# Altium PCB TenkUbavic.PcbDoc
Units mm, origin at the board's own origin, x right, y up, seen from the top; angles counter-clockwise.
Board outline 115.7 x 87.88 mm, 2 copper layers (Top Layer, Bottom Layer); 48 components, 36 nets, 179 pads, 29 vias.
Unrouted connection lines stored in the file: 1.
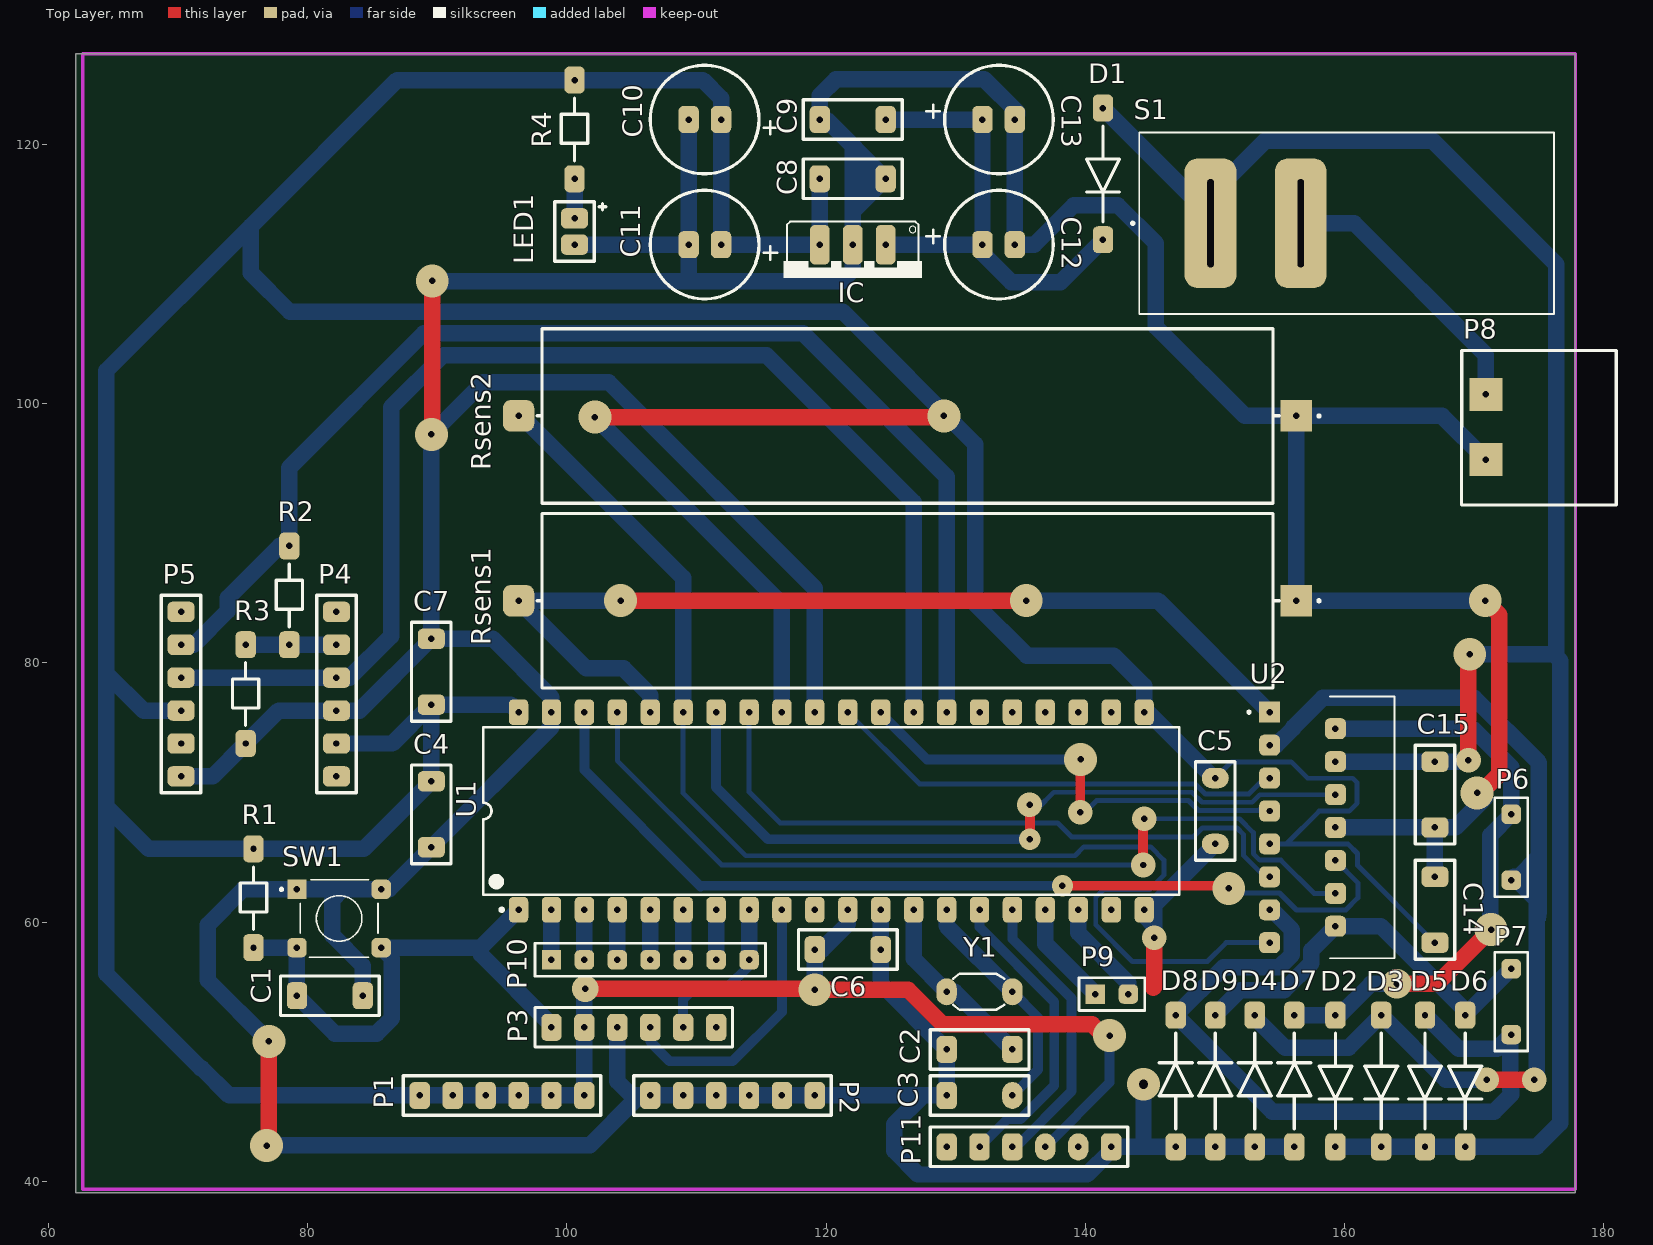
[diagram p0: Top Layer view]
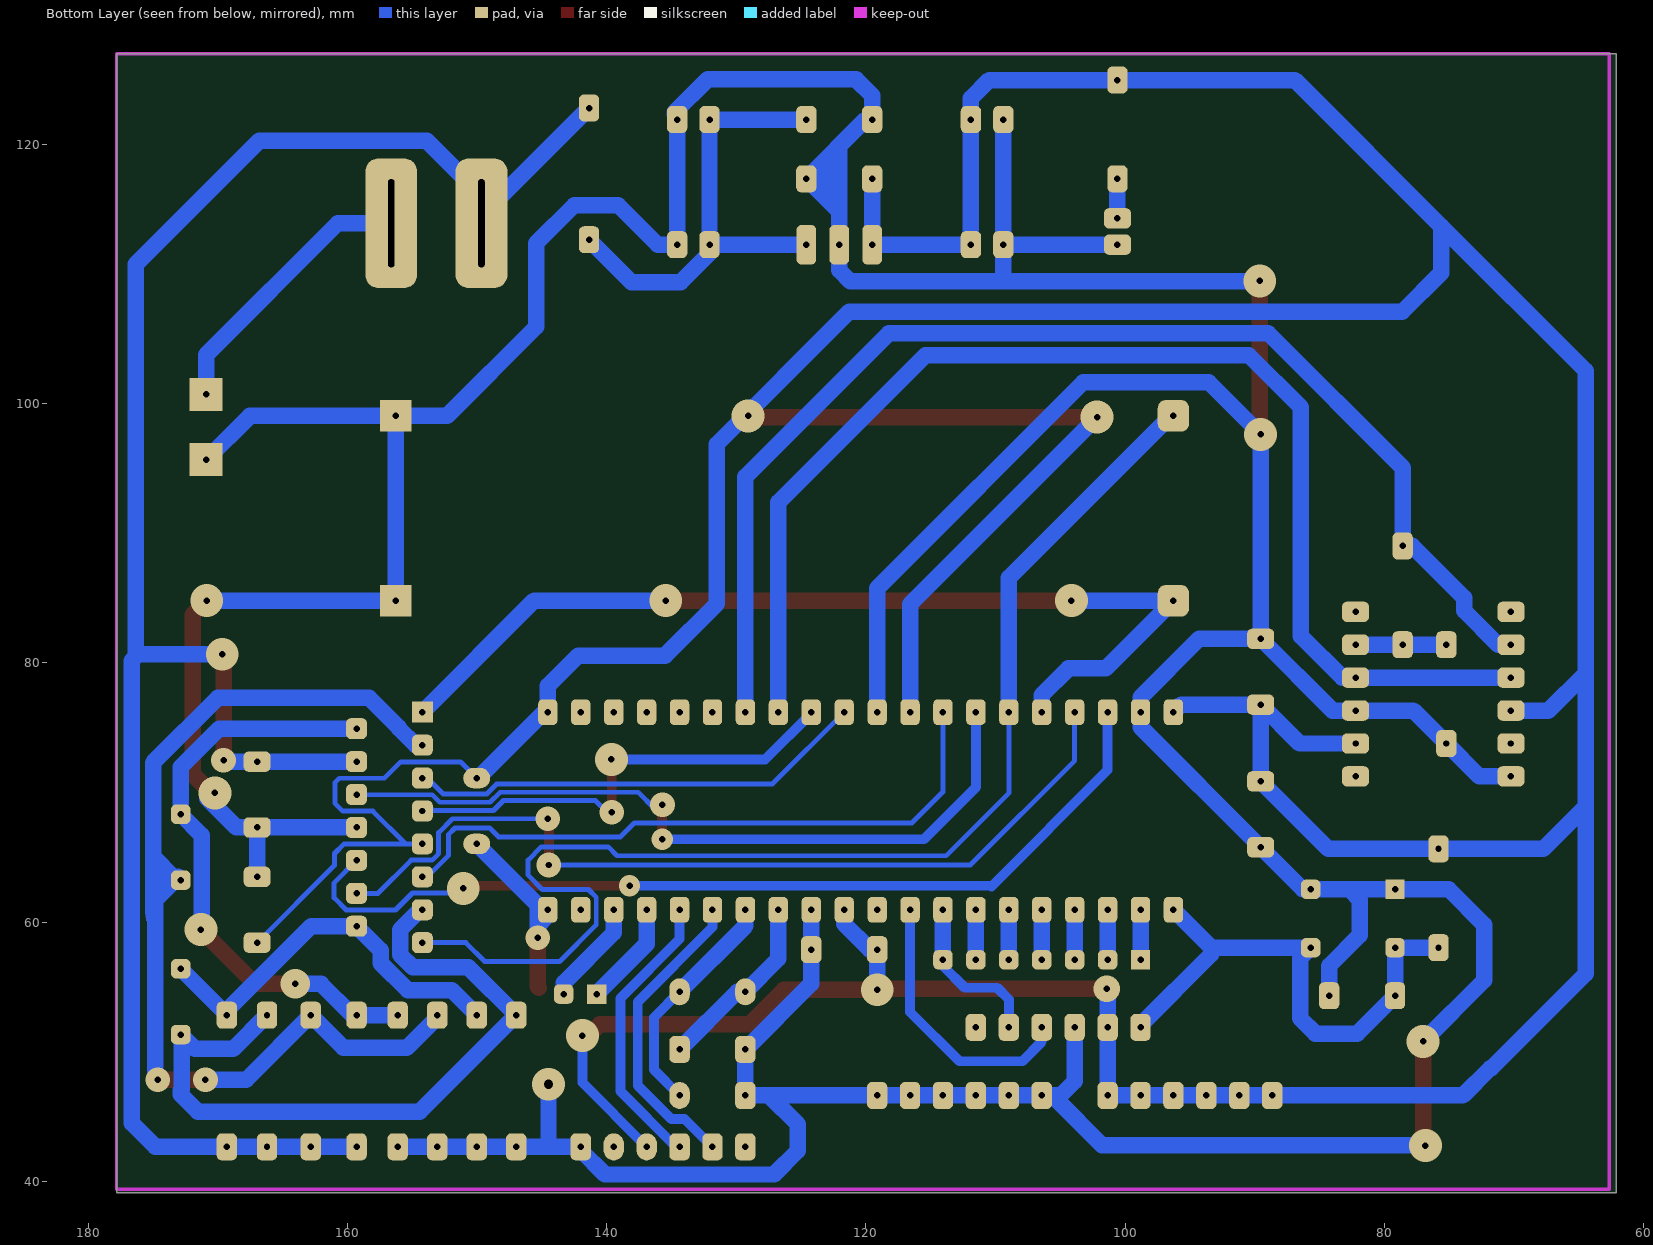
[diagram p1: Bottom Layer view, seen from below]

## Layer stack, top to bottom
Top Solder: solder mask 0.0102, Solder Resist, Dk 3.5
Top Layer: signal copper 0.0356
Dielectric 1: dielectric 0.32, FR-4, Dk 4.8
Bottom Layer: signal copper 0.0356
Bottom Solder: solder mask 0.0102, Solder Resist, Dk 3.5

## Board outline
62.103,39.116 177.8,39.116 177.8,127 62.103,127

## Design rules (kind name [scope] priority, off if disabled: settings)
Clearance [All] p1: gap=0.254 ignorepadtopadclearanceinfootprint=FALSE
PolygonConnect [All] p1: connectstyle=Relief reliefconductorwidth=0.254 reliefentries=4 polygonreliefangle="90 Angle" airgapwidth=0.254
RoutingVias [All] p1: holewidth=0.711 width=1.27 viastyle="Through Hole" minholewidth=0.711 minwidth=1.27 maxholewidth=0.711 maxwidth=1.27
SolderMaskExpansion [All] p1: expansion=0.102
Width Width_1 [InNetClass('PWR')] p1: maxlimit=1.27 minlimit=1.27 preferedwidth=1.27
Width [InNetClass('Signal')] p2: maxlimit=1.27 minlimit=0.381 preferedwidth=0.762
30 further rules are at their usual default settings.

## Components (designator, comment, footprint, x,y, rotation, side; value= is the part's Value field where it differs from the comment)
C1 "Cap" CAP200#1 84.253,54.331 r180 top value=100nF
C2 "Cap" CAP200#1 129.286,50.19 r0 top value=33pF
C3 "Cap" CAP200#2 129.286,46.634 r0 top value=33pF
C4 "Cap" CAP200#1 89.535,65.786 r90 top value=100nF
C5 "Cap" CAP200#3 150.012,66.04 r90 top value=100nF
C6 "Cap" CAP200#1 124.206,57.887 r180 top value=100nF
C7 "Cap" CAP200#1 89.535,81.864 r270 top value=100nF
C8 "Cap" CAP200#1 124.587,117.348 r180 top value=100nF
C9 "Cap" CAP200#1 119.507,121.92 r0 top value=100nF
C10 "Cap Pol1" RAD4 111.887,121.92 r180 top value=470uF
C11 "Cap Pol1" RAD4 111.887,112.268 r180 top value=470uF
C12 "Cap Pol1" RAD4 132.055,112.268 r0 top value=470uF
C13 "Cap Pol1" RAD4 132.055,121.92 r0 top value=470uF
C14 "Cap" CAP200#1 166.954,63.5 r270 top value=100nF
C15 "Cap" CAP200#1 166.954,67.31 r90 top value=100nF
D1 "Diode 1N4007" DIODE400 141.351,117.983 r90 top
D2 "Diode 1N5402" DIODE400 159.283,48.006 r90 top
D3 "Diode 1N5402" DIODE400 162.814,48.006 r90 top
D4 "Diode 1N5402" DIODE400 153.06,47.498 r270 top
D5 "Diode 1N5402" DIODE400 166.192,48.006 r90 top
D6 "Diode 1N5402" DIODE400 169.291,48.006 r90 top
D7 "Diode 1N5402" DIODE400 156.109,47.498 r270 top
D8 "Diode 1N5402" DIODE400 146.964,47.498 r270 top
D9 "Diode 1N5402" DIODE400 150.012,47.498 r270 top
IC "L7805" 78XXS 122.047,109.728 r180 top
LED1 "GREEN" LED_2 100.965,113.284 r270 top
P1 "5V" HEADER_6#1 94.996,46.634 r90 top
P2 "GND" HEADER_6#1 112.776,46.634 r90 top
P3 "Programator" HEADER_6#1 105.156,51.892 r90 top
P4 "Bluetooth" HEADER_6#1 82.22,77.597 r180 top
P5 "FT232" HEADER_6#1 70.231,77.597 r0 top
P6 "Motor 1" KLEMA 172.847,65.659 r270 top
P7 "Motor 2" KLEMA 172.847,54 r90 top
P8 "2EDGRC-5.08-02P-14-00A(H)" PWR_Con 174.955,98.603 r0 top
P9 "Interrupt" HDR1X2 140.767,54.458 r0 top
P10 "GPIO" HDR1X7 98.806,57.099 r0 top
P11 "FT232" HEADER_6#2 135.636,42.672 r90 top
R1 "Res1" RES400 75.819,61.849 r90 top value=10K
R2 "Res1" RES400 78.588,85.217 r90 top value=4.7K
R3 "Res1" RES400 75.209,77.597 r90 top value=10K
R4 "Res1" RES400 100.584,121.158 r90 top value=1K
Rsens1 "15W" Rsens 126.266,84.797 r180 top value=5
Rsens2 "15W" Rsens 126.266,99.06 r180 top value=5
S1 "" SW_RB141C1100 160.147,113.919 r180 top
SW1 "TASTER" SW_1825910-6-4 82.423,60.289 r0 top
U1 "DSPIC30F4013-20I/P" PDIP600-P40 120.396,68.58 r90 top
U2 "L298N" TO127P2020X500X2100-15 154.203,76.2 r0 top
Y1 "XTAL" OSC_5 131.445,54.635 r90 top

## Footprints (in the part's own frame and the unit in brackets; to place one, negate y for a bottom-side part, rotate by r counter-clockwise, add the part's x,y. Pads: shape width x height; smd on the part's side, far side on the other; paste and mask are expansions set on the pad)
78XXS [mil]
  rrect50% 60x120 hole 19.68: GND(0,-100) IN(-100,-100) OUT(100,-100)
  silkscreen extent -210,-170 210,0
CAP200#1 [mil]
  rrect50% 62x82 hole 19.68: 1(0,0) 2(200,0)
  silkscreen extent -50,-60 250,60
CAP200#2 [mil]
  rrect50% 62x82 hole 19.68: 1(0,0)
  oval 62x82 hole 19.68: 2(200,0)
  silkscreen extent -50,-60 250,60
CAP200#3 [mil]
  oval 62x82 hole 19.68: 1(0,0) 2(200,0)
  silkscreen extent -50,-60 250,60
DIODE400 [mil]
  rrect50% 82x62 hole 19.68: 1(190,0) 2(-210,0)
  silkscreen extent -155,-50 135,50
HDR1X2 [mm] "Connector; Header; 2 Position"
  rect 1.5x1.5 hole 0.5: 1(0,0)
  rrect50% 1.5x1.5 hole 0.5: 2(2.54,0)
  silkscreen extent -1.27,-1.27 3.81,1.27
HDR1X7 [mm] "Connector; Header; 7 Position"
  rect 1.5x1.5 hole 0.5: 1(0,0)
  rrect50% 1.5x1.5 hole 0.5: 2(2.54,0) 3(5.08,0) 4(7.62,0) 5(10.16,0) 6(12.7,0) 7(15.24,0)
  silkscreen extent -1.27,-1.27 16.51,1.27
HEADER_6#1 [mil]
  rrect50% 82x62 hole 19.68: 1(0,250) 2(0,150) 3(0,50) 4(0,-50) 5(0,-150) 6(0,-250)
  silkscreen extent -60,-300 60,300
HEADER_6#2 [mil]
  rrect50% 82x62 hole 19.68: 1(0,250) 2(0,150) 3(0,50) 6(0,-250)
  oval 82x62 hole 19.68: 4(0,-50) 5(0,-150)
  silkscreen extent -60,-300 60,300
KLEMA [mm] "Connector; Header; 2 Position"
  rrect50% 1.5x1.5 hole 0.5: 1(-2.667,0) 2(2.413,0)
  silkscreen extent -3.94,-1.27 3.68,1.27
LED_2 [mil]
  rrect50% 62x82 hole 19.68: 1(40,-15) 2(-40,-15)
  silkscreen extent -90,-75 90,80, body extent -105,-126 110,106, height 346
OSC_5 [mil]
  oval 82x62 hole 19.68: 1(0,-115) 2(0,85)
  silkscreen extent -55,-90 55,65, body extent -92,-240 92,207, height 138
PDIP600-P40 [mm] "DIP, 40-Leads, Row Spacing 15.24mm, Pitch 2.54mm, Body 51.8x13.5mm"
  rrect50% 2x1.5 hole 0.5: 1(-7.62,24.13) 2(-7.62,21.59) 3(-7.62,19.05) 4(-7.62,16.51) 5(-7.62,13.97) 6(-7.62,11.43) 7(-7.62,8.89) 8(-7.62,6.35) 9(-7.62,3.81) 10(-7.62,1.27) 11(-7.62,-1.27) 12(-7.62,-3.81) 13(-7.62,-6.35) 14(-7.62,-8.89) 15(-7.62,-11.43) 16(-7.62,-13.97) 17(-7.62,-16.51) 18(-7.62,-19.05) 19(-7.62,-21.59) 20(-7.62,-24.13) 21(7.62,-24.13) 22(7.62,-21.59) 23(7.62,-19.05) 24(7.62,-16.51) 25(7.62,-13.97) 26(7.62,-11.43) 27(7.62,-8.89) 28(7.62,-6.35) 29(7.62,-3.81) 30(7.62,-1.27) 31(7.62,1.27) 32(7.62,3.81) 33(7.62,6.35) 34(7.62,8.89) 35(7.62,11.43) 36(7.62,13.97) 37(7.62,16.51) 38(7.62,19.05) 39(7.62,21.59) 40(7.62,24.13)
  silkscreen extent -7.74,-26.85 6.45,26.85, body extent -7.3,-26.85 7.3,26.85, height 6.35
PWR_Con [mil]
  rect 100x100 hole 19.68: 1(-160,-115) 2(-160,83)
  silkscreen extent -234,-253 236,217, body extent -239,-256 234,222, height 344
RAD4 [mil]
  rrect50% 62x82 hole 19.68: 1(0,0) 2(98.43,0)
  silkscreen extent -170,-165 215,165
RES400 [mil]
  rrect50% 82x62 hole 19.68: 1(-150,0) 2(150,0)
  silkscreen extent -95,-40 95,40
Rsens [mm]
  rrect50% 2.43x2.43 hole 0.5: A(30,0)
  rect 2.43x2.43 / inner round 2.43 / far side rect 2.43x2.43 hole 0.5: C(-30,0)
  silkscreen extent -31.85,-6.73 28.57,6.73
SW_1825910-6-4 [mm]
  rect 1.498x1.498 hole 0.5: 1(-3.25,2.25)
  rrect50% 1.498x1.498 hole 0.5: 2(3.25,2.25) 3(-3.25,-2.25) 4(3.25,-2.25)
  silkscreen extent -4.54,-3 3,3
SW_RB141C1100 [mm]
  rrect50% 4x10 hole 0.5 slot 6.8 at 90 deg: 1(10.5,0) 2(3.54,0)
  silkscreen extent -16,-7 16.6,7, body extent -16.35,-7 16.35,7, height 24.57
TO127P2020X500X2100-15 [mm]
  rect 1.62x1.62 hole 0.5: 1(0,0)
  rrect50% 1.62x1.62 hole 0.5: 2(5.08,-1.27) 3(0,-2.54) 4(5.08,-3.81) 5(0,-5.08) 6(5.08,-6.35) 7(0,-7.62) 8(5.08,-8.89) 9(0,-10.16) 10(5.08,-11.43) 11(0,-12.7) 12(5.08,-13.97) 13(0,-15.24) 14(5.08,-16.51) 15(0,-17.78)
  silkscreen extent -1.69,-18.99 9.63,1.21

## Part data
C1 C2 C3 C4 C5 C6 C7 C8 C9 C14 C15: "Capacitor", LatestRevisionDate=17-Jul-2002, LatestRevisionNote="Re-released for DXP Platform.", PackageDescription="Radial Cap, Thru-Hole; 2 Leads; 0.3 in Pin Spacing", PackageReference=RAD-0.3, Published=8-Jun-2000, Publisher="Altium Limited"
C10 C11 C12 C13: "Polarized Capacitor (Radial)", LatestRevisionDate=17-Jul-2002, LatestRevisionNote="Re-released for DXP Platform.", PackageDescription="Polarized Capacitor (Radial); 2 Leads", PackageReference=RB7.6-15, Published=8-Jun-2000, Publisher="Altium Limited"
D1: "1 Amp General Purpose Rectifier", Code_JEDEC=DO-204-AL, ComponentLink1Description="Manufacturer Link", ComponentLink1URL=http://www.fairchildsemi.com/, ComponentLink2Description=Datasheet, ComponentLink2URL=http://www.fairchildsemi.com/ds/1N%2F1N4001.pdf, DatasheetVersion=1998, LatestRevisionDate=17-Jul-2002, LatestRevisionNote="Re-released for DXP Platform.", PackageDescription="Diode, Axial; Body 5.2 x 2.7 mm (LxDia. max), Lead Dia. 0.86 mm (max)", PackageReference=DO-41, PackageVersion=Aug-1999, Published=8-Jun-2000, Publisher="Altium Limited"
D2 D3 D4 D5 D6 D7 D8 D9: "3 Amp General Purpose Rectifier", ComponentLink1Description="Manufacturer Link", ComponentLink1URL=http://www.fairchildsemi.com/, ComponentLink2Description=Datasheet, ComponentLink2URL=http://www.fairchildsemi.com/ds/1N%2F1N5400.pdf, DatasheetVersion=1998, LatestRevisionDate=17-Jul-2002, LatestRevisionNote="Re-released for DXP Platform.", PackageDescription="Diode, Axial; Body 9.5 x 5.6 mm (LxDia. max), Lead Dia. 1.32 mm (max)", PackageReference=DO-201AD, PackageVersion=Aug-1999, Published=8-Jun-2000, Publisher="Altium Limited"
IC: "Linear Voltage Regulator IC 1 Output 1.5A D2PAK", Package="TO-263-3 Inchange Semiconductor", Availability=Unavailable, MF=STMicroelectronics, MP=L7805, Price=None, SnapEDA_Link=https://www.snapeda.com/parts/L7805/STMicroelectronics/view-part/563125/?ref=snap
LED1: library part LED1, "Typical RED GaAs LED", LatestRevisionDate=08-Jul-2005, LatestRevisionNote="Mech Layer 1 removed.", PackageDescription="LED; 2 Leads", PackageReference=LED-1, Published=8-Jun-2000, Publisher="Altium Limited"
P1 P2 P3 P4 P5 P11: library part "Header 6", "Header, 6-Pin", LatestRevisionDate=17-Jul-2002, LatestRevisionNote="Re-released for DXP Platform.", Publisher="Altium Limited"
P6 P7 P9: library part "Header 2", "Header, 2-Pin", LatestRevisionDate=17-Jul-2002, LatestRevisionNote="Re-released for DXP Platform.", Publisher="Altium Limited"
P8: library part 00000002, "TERM BLOCK HDR 2POS 90DEG 5.08MM", Manufacturer Part Number=2EDGRC-5.08-02P-14-00A(H), Price=0.1304, Suplier=TME, Suplier Product Link=https://www.tme.eu/en/details/2edgrc5.08-2p14/pluggable-terminal-blocks/degson-electronics/2edgrc-508-02p-14-00ah/
P10: library part "Header 7", "Header, 7-Pin", LatestRevisionDate=17-Jul-2002, LatestRevisionNote="Re-released for DXP Platform.", Publisher="Altium Limited"
R1 R2 R3 R4: "Resistor", LatestRevisionDate=17-Jul-2002, LatestRevisionNote="Re-released for DXP Platform.", PackageDescription="Axial Device, Thru-Hole; 2 Leads; 0.3 in Pin Spacing", PackageReference=AXIAL-0.3, Published=8-Jun-2000, Publisher="Altium Limited"
Rsens1 Rsens2: library part Res1, "Resistor", LatestRevisionDate=17-Jul-2002, LatestRevisionNote="Re-released for DXP Platform.", PackageDescription="Axial Device, Thru-Hole; 2 Leads;", Published=8-Jun-2000, Publisher="Altium Limited"
S1: library part RB141C1100, "Rocker Switches 15A 125VAC, OFF-ON, Black Rocker, No Markings", Package=None, Availability="In Stock", Check_prices=https://www.snapeda.com/parts/RB141C1100/ITC/view-part/?ref=eda, MF="e-switch inc", MP=RB141C1100, Price=None, Purchase-URL=https://pricing.snapeda.com/search/part/RB141C1100/?ref=eda, SnapEDA_Link=https://www.snapeda.com/parts/RB141C1100/ITC/view-part/?ref=snap
SW1: library part 1825910-6, "Switch Tactile OFF (ON) SPST Round Button PC Pins 0.05A 24VDC 100000Cycles 1.57N Thru-Hole Loose", Package=None, Availability=Unavailable, MP=1825910-6, Price=None
U1: "High-Performance 16-bit Digital Signal Controller, 48 KB Flash, 2 KB SRAM, 1 KB EEPROM, 40-Pin PDIP, Industrial Temperature", Supplier Part Number 1=DSPIC30F4013-20IP-ND, ComponentLink1Description=Datasheet, ComponentLink1URL=http://ww1.microchip.com/downloads/en/DeviceDoc/70138F.pdf, ComponentLink2Description="Packaging Specification", ComponentLink2URL=http://www.microchip.com/stellent/groups/techpub_sg/documents/packagingspec/en012702.pdf, ComponentLink3Description="Microchip.com Home", ComponentLink3URL=http://www.microchip.com/, DatasheetVersion="revF, Apr-2008", PackageDescription="40-Lead Plastic Dual In-Line (P) - 600 mil Body [PDIP]", PackageReference=PDIP600-P40, PackageVersion="revBB, Aug-2009", Published=29-Jan-2009, Publisher="Altium Limited", Supplier 1=Digi-Key, Supplier 2=Farnell, Supplier Part Number 2=1439755
U2: "Dual Full Bridge Motor Driver 15-Pin(15+Tab) MULTIWATT V Tube", Package=None, Availability=Unavailable, MP=L298N, Price=None
Y1: "Crystal Oscillator", LatestRevisionDate=17-Jul-2002, LatestRevisionNote="Re-released for DXP Platform.", PackageDescription="Crystal, Thru-Hole; 2 Leads; Body 3.1 x 8.2 mm (Dia.xH)", PackageReference=R38, Published=8-Jun-2000, Publisher="Altium Limited"

## Via types
v1: diameter 2.54, hole 0.5, Top Layer to Bottom Layer, 15 vias
v2: diameter 1.905, hole 0.5, Top Layer to Bottom Layer, 8 vias
v3: diameter 1.651, hole 0.5, Top Layer to Bottom Layer, 2 vias
v4: diameter 2.54, hole 0.711, Top Layer to Bottom Layer, 1 vias
v5: diameter 2.032, hole 0.5, Top Layer to Bottom Layer, 1 vias
v6: diameter 2.286, hole 0.5, Top Layer to Bottom Layer, 1 vias
v7: diameter 2.5, hole 0.5, Top Layer to Bottom Layer, 1 vias

## Nets (pads, with @x,y where several pads share a name; then routed paths per layer and width w, separated by ;. In a path a pad name is that pad's centre, name@x,y a point inside that pad or via, vN(x,y) a via of type N, cw(c..) or ccw(c..) an arc to the next point about the centre after c; other vN are vias at no path point)
+5: C4.2 C5.2 C6.2 C7.2 C8.2 C10.1 C11.1 C14.2 IC.OUT P1.1 P1.2 P1.3 P1.4 P1.5 P1.6 P3.2 P4.2 P5.4 P11.4 R1.2 R4.2 U1.11 U1.21 U1.32 U1.40 U2.9 | length 490.3
  Top Layer w1.27: v5(101.422,54.864) 119.05,54.864 v7(119.126,54.788) 126.314,54.788 128.981,52.121 140.513,52.121 141.376,51.257 v1(141.859,51.257) ; v1(102.159,98.958) v1@129.083,98.958
  Bottom Layer w0.381: C5.2 151.267,72.374 155.87,72.374 157.14,71.104 160.62,71.104 160.96,70.764 160.96,69.19 160.335,68.564 158.029,68.564 155.504,66.04 U2.9 154.219,66.024 160.264,66.024 160.985,65.303 160.985,64.389 C14.2
  Bottom Layer w0.762: P11.4 141.859,47.625 v1(141.859,51.257)
  Bottom Layer w1.27: P5.4 67.335,76.327 64.465,79.197 ; P4.2 86.538,73.787 C7.2 ; U1.40 95.682,76.784 C7.2 ; v5(101.422,54.864) 101.346,54.788 P3.2 P1.6 P1.5 P1.4 P1.3 P1.2 P1.1 73.94,46.634 71.831,48.743 71.755,48.743 64.465,56.032 64.465,68.936 ; v1(102.159,98.958) 116.586,84.531 U1.32 ; v7(119.126,54.788) C6.2 119.685,57.887 121.666,59.868 U1.11 ; C8.2 IC.OUT C11.1 C10.1 111.887,123.571 110.49,124.968 R4.2 86.894,124.968 75.616,113.69 ; C5.2@150.012,71.222 149.8,71.222 144.822,76.2 U1.21 144.526,78.232 142.189,80.569 135.484,80.569 131.496,84.557 131.496,96.876 121.285,107.086 78.613,107.086 75.616,110.084 75.616,113.69 ; 64.465,68.936 64.465,79.197 ; 64.465,68.936 67.742,65.659 R1.2 84.328,65.659 C4.2 C7.2 ; 64.465,79.197 64.465,102.54 75.616,113.69
  other v1: 129.083,99.06
GND: C1.1 C2.1 C3.1 C4.1 C5.1 C6.1 C7.1 C8.1 C9.1 C10.2 C11.2 C12.2 C13.2 C14.1 C15.1 D4.1 D7.1 D8.1 D9.1 IC.GND LED1.1 P2.1 P2.2 P2.3 P2.4 P2.5 P2.6 P3.3 P4.3 P5.6 P8.1 P11.6 R3.1 Rsens1.C Rsens2.C SW1.1 SW1.2 U1.12 U1.20 U1.31 U1.39 U2.8 | length 515.9
  Top Layer w1.27: v1(76.835,42.774) 77.013,42.951 v1(77.013,50.8) ; v1@89.611,97.638 v1(89.611,109.474) ; 145.237,54.94 145.313,55.016 v2(145.313,58.801) ; v1(170.205,69.977) 170.332,69.977 170.409,69.901 171.933,71.425 171.933,83.718 v1(170.84,84.811)
  Bottom Layer w1.27: P5.6 72.669,71.247 R3.1 77.749,76.327 P4.3 83.998,76.327 C7.1 ; v1(77.013,50.8) 72.288,55.524 72.288,59.792 75.036,62.539 SW1.1 82.707,62.539 ; v1@77.292,42.799 101.778,42.799 105.296,46.317 104.978,46.634 P2.1 P2.2 P2.3 P2.4 P2.5 P2.6 127.457,46.634 ; C1.1 84.253,56.641 81.89,59.004 81.89,61.722 82.707,62.539 ; v1(89.611,109.474) 89.626,109.459 109.387,109.459 C11.2 ; LED1.1 C11.2 ; P3.3@103.886,51.689 103.886,47.727 104.915,46.698 ; 109.387,109.449 121.209,109.449 122.047,110.287 IC.GND 122.047,114.808 C8.1 120.015,121.92 C9.1 119.507,123.774 120.752,125.019 132.207,125.019 134.747,122.479 134.747,122.304 134.555,122.112 C13.2 C12.2 136.042,112.268 139.09,115.316 142.494,115.316 145.415,112.395 145.415,105.943 152.298,99.06 Rsens2.C ; C10.2 C11.2 ; U1.31 119.126,85.75 103.226,101.651 93.548,101.651 v1(89.535,97.638) C7.1 ; U1.12 C6.1 124.206,55.27 C2.1 C3.1 127.457,46.634 ; v4(144.475,47.498) 144.475,42.672 ; v2(145.313,58.801) 145.313,59.715 144.526,60.503 U1.20 144.932,60.96 C5.1 ; D7.1 D4.1 D9.1 D8.1 144.475,42.672 ; U2.8 C15.1 ; C14.1 C15.1 ; v1(170.205,69.977) 170.358,69.977 170.79,69.545 168.554,67.31 C15.1 ; v1(170.84,84.811) 170.827,84.797 Rsens1.C Rsens2.C ; P8.1 167.513,99.06 Rsens2.C ; 82.707,62.539 SW1.2 86.288,62.539 C4.1 98.806,75.057 U1.39 98.806,77.343 94.285,81.864 C7.1 ; 127.457,46.634 125.247,44.425 125.247,42.367 127.076,40.538 140.117,40.538 141.986,42.408 P11.6 144.475,42.672
INT0: P9.1 U1.17 | length 8.1
  Bottom Layer w1.27: U1.17 136.906,58.319 P9.1
INT2: P9.2 U1.18 | length 8.1
  Bottom Layer w1.27: U1.18 139.446,59.182 143.307,55.321 P9.2
MCLR: C1.2 P3.1 R1.1 SW1.3 SW1.4 U1.1 | length 41.9
  Bottom Layer w1.27: R1.1 SW1.3 C1.2 82.094,51.41 85.319,51.41 86.487,52.578 86.487,57.225 SW1.4 93.345,58.039 ; U1.1 93.345,58.039 ; P3.1@98.806,52.07 93.345,57.531 93.345,58.039
NetC9_2: C9.2 C12.1 C13.1 D1.2 IC.IN | length 36.8
  Bottom Layer w1.27: IC.IN C12.1 ; C9.2 C13.1 C12.1 ; D1.2 138.074,109.372 134.29,109.372 132.055,111.607 C12.1
NetLED1_1: LED1.2 R4.1 | length 3
  Bottom Layer w1.27: LED1.2 R4.1
NetP4_5: P4.5 R2.1 R3.2 | length 7
  Bottom Layer w1.27: R3.2 R2.1 P4.5
NetP8_2: P8.2 S1.2 | length 21.5
  Bottom Layer w1.27: S1.2 160.731,113.919 170.891,103.759 P8.2
OSC1: C2.2 U1.13 Y1.2 | length 14.3
  Bottom Layer w1.27: U1.13 126.746,57.175 Y1.2 129.921,54.635 C2.2
OSC2: C3.2 U1.14 Y1.1 | length 18.2
  Bottom Layer w0.762: C3.2 136.347,48.615 136.347,52.654 Y1.1
  Bottom Layer w1.27: U1.14@129.184,60.858 U1.14 129.286,59.715 Y1.1
OUT1: D2.1 D7.2 P6.1 U2.2 | length 45.4
  Top Layer w1.27: v6(164.008,55.245) 167.107,55.245 v1(171.298,59.436)
  Bottom Layer w1.27: D7.2 D2.1 159.614,52.832 162.001,55.22 162.001,55.245 163.246,55.245 163.322,55.321 163.271,55.321 v6@163.246,55.347 ; U2.2 169.89,74.93 172.847,71.973 P6.1 171.221,66.7 171.221,63.938 171.208,63.925 171.208,62.567 171.221,62.554 171.221,59.512 v1(171.298,59.436)
OUT2: D3.1 D4.2 P6.2 U2.3 | length 76.2
  Top Layer w1.27: v2(170.942,47.854) v2(174.625,47.854)
  Bottom Layer w1.27: D4.2 153.06,52.654 155.397,50.317 160.299,50.317 D3.1 167.792,47.854 v2(170.942,47.854) ; U2.3 154.72,73.66 156.029,74.969 156.029,75.029 158.318,77.318 169.977,77.318 174.981,72.314 174.981,65.075 174.904,64.999 174.904,64.983 P6.2@173.422,63.5 ; P6.2@173.025,63.5 174.854,61.671 174.803,61.62 174.803,48.031 v2(174.625,47.854)
OUT3: D5.1 D8.2 P7.1 U2.13 | length 57.4
  Bottom Layer w1.27: U2.13 154.381,60.96 155.905,59.436 155.905,57.482 154.938,56.515 150.647,56.515 D8.2 154.406,45.39 171.526,45.39 172.847,46.711 172.847,47.027 172.784,47.091 P7.1@172.784,51.27 ; D5.1 168.783,50.241 171.755,50.241 P7.1@172.784,51.27 ; P7.1 P7.1@172.784,51.27
OUT4: D6.1 D9.2 P7.2 U2.14 | length 30.8
  Bottom Layer w1.27: D9.2 151.943,54.762 155.341,54.762 157.429,56.851 157.429,57.836 U2.14 162.789,59.69 169.291,53.188 D6.1@169.291,52.857 ; D6.1 D6.1@169.291,52.857 ; P7.2 D6.1@169.291,52.857
PGC: P3.5 P10.7 U1.8 | length 12.8
  Bottom Layer w0.762: P3.5@108.966,51.689 P3.5 108.966,54.051 109.855,54.94 112.37,54.94 114.046,56.617 P10.7
  Bottom Layer w1.27: P10.7 U1.8
PGD: P3.4 U1.9 | length 21.8
  Bottom Layer w0.762: P3.4@106.426,52.349 P3.4 106.426,50.775 107.925,49.276 112.776,49.276 116.586,53.086 U1.9
PWM1: U1.34 U2.6 | length 59.1
  Top Layer w0.762: v2(135.687,69.063) 135.712,69.037 v3(135.712,66.396)
  Bottom Layer w0.381: v2(135.687,69.063) 136.081,69.063 136.334,68.809 137.554,70.028 148.21,70.028 148.985,69.253 152.865,69.253 153.447,69.834 159.268,69.834 U2.6
  Bottom Layer w0.762: U1.34 111.506,70.409 115.519,66.396 v3(135.712,66.396)
PWM2: U1.33 U2.11 | length 50.5
  Bottom Layer w0.381: U1.33 114.046,70.053 116.434,67.666 137.846,67.666 138.925,66.586 148.331,66.586 149.017,67.272 151.685,67.272 152.197,66.76 152.197,65.137 153.834,63.5 U2.11
RB0: P10.1 U1.2 | length 3.9
  Bottom Layer w1.27: P10.1 U1.2
RB1: P10.2 U1.3 | length 3.9
  Bottom Layer w1.27: P10.2 U1.3
RB2: P10.3 U1.4 | length 3.9
  Bottom Layer w1.27: P10.3 U1.4
RB3: P10.4 U1.5 | length 3.9
  Bottom Layer w1.27: P10.4 U1.5
RB4: P10.5 U1.6 | length 3.9
  Bottom Layer w1.27: P10.5 U1.6
RB5: P10.6 U1.7 | length 3.9
  Bottom Layer w1.27: P10.6 U1.7
RB9: U1.38 U2.10 | length 73.5
  Top Layer w0.762: v3(138.227,62.814) 150.851,62.814 v1(151.054,62.611)
  Bottom Layer w0.381: v1(151.054,62.611) v1@151.054,62.535 ; U2.10 161.011,63.043 161.011,61.874 160.081,60.944 156.276,60.944 154.968,62.253 154.96,62.245 151.343,62.245 v1@151.054,62.535 ; v1@151.054,62.535 150.825,62.535 151.054,62.306 v1@151.054,62.535
  Bottom Layer w0.762: U1.38 101.346,71.73 110.312,62.763 110.363,62.814 v3(138.227,62.814)
RB10: U1.37 U2.12 | length 69.3
  Top Layer w0.762: v2(144.45,64.414) 144.45,67.907 v2(144.526,67.983)
  Bottom Layer w0.381: U1.37 103.886,72.466 111.938,64.414 v2(144.45,64.414) ; v2(144.526,67.983) 151.879,67.983 152.949,66.914 152.949,65.283 153.447,64.785 155.077,64.785 157.632,62.23 U2.12
RB11: Rsens1.A U1.36 U2.1 | length 76
  Top Layer w1.27: v1(104.14,84.811) v1(135.433,84.811)
  Bottom Layer w1.27: v1(104.14,84.811) 104.127,84.797 Rsens1.A 101.485,79.578 104.369,79.578 106.426,77.521 U1.36 ; v1(135.433,84.811) 145.593,84.811 U2.1
RB12: Rsens2.A U1.35 U2.15 | length 98.7
  Bottom Layer w0.381: U1.35 108.966,69.952 113.792,65.126 139.192,65.126 139.878,65.811 145.028,65.811 146.05,64.79 146.05,63.627 144.946,62.523 141.39,62.523 140.791,61.924 140.791,59.792 143.612,56.972 149.403,56.972 150.851,58.42 U2.15
  Bottom Layer w1.27: Rsens2.A 96.469,99.06 108.966,86.563 U1.35
RF0: U1.30 U2.5 | length 35.7
  Bottom Layer w0.381: U1.30 127.203,70.663 148.473,70.663 149.248,69.888 152.602,69.888 153.834,71.12 U2.5
RF1: U1.29 U2.7 | length 37
  Top Layer w0.762: v2(139.598,68.478) 139.598,72.542 v1(139.624,72.568)
  Bottom Layer w0.381: v2(139.598,68.478) 139.949,68.478 140.864,69.393 147.947,69.393 148.722,68.618 153.365,68.618 153.765,69.018 U2.7
  Bottom Layer w0.762: U1.29 124.206,76.098 127.762,72.542 v1@139.624,72.542 ; v2@139.395,68.605 139.522,68.478 v2(139.598,68.478)
U1ARX: P11.3 U1.16 | length 22.2
  Bottom Layer w0.762: P11.3 134.64,42.672 138.928,46.96 138.928,54.135 134.366,58.697 U1.16
U1ATX: P11.2 U1.15 | length 23.7
  Bottom Layer w0.762: P11.2 133.985,44.831 135.008,44.831 137.592,47.415 137.592,53.855 131.826,59.621 U1.15
U2RX: P4.4 P5.3 U1.28 | length 98
  Bottom Layer w1.27: P5.3 P4.4 83.236,78.867 86.436,82.067 86.436,99.72 90.449,103.734 115.392,103.734 126.746,92.38 U1.28
U2TX: P5.2 R2.2 U1.27 | length 95.9
  Bottom Layer w1.27: P5.2 71.222,81.407 73.838,84.023 73.838,85.014 77.851,89.027 R2.2 78.588,95.072 88.951,105.435 118.212,105.435 129.286,94.361 U1.27
VCC: C15.2 D1.1 D2.2 D3.2 D5.2 D6.2 S1.1 U2.4 | length 156.3
  Top Layer w1.27: v2(169.545,72.492) 169.545,80.239 169.266,80.518 169.418,80.67 v1(169.647,80.67)
  Bottom Layer w1.27: D1.1 S1.1@149.647,114.513 ; S1.1 S1.1@149.647,114.513 ; D2.2 D3.2 D5.2 D6.2 174.799,42.672 176.632,44.505 176.632,80.188 176.301,80.518 ; U2.4 C15.2 169.443,72.39 v2(169.545,72.492) ; v1(169.647,80.67) 176.149,80.67 176.301,80.518 ; S1.1@149.647,114.513 149.647,116.068 153.848,120.269 166.802,120.269 176.301,110.769 176.301,80.518
pads on no net: P3.6 P4.1 P4.6 P5.1 P5.5 P11.1 P11.5 U1.10 U1.19 U1.22 U1.23 U1.24 U1.25 U1.26

## Keep-outs
Keep-Out Layer:
  lines w0.254: 62.636,39.395 62.636,127 62.941,127 63.5,127 177.8,127 177.8,39.395 62.636,39.395

## Other copper
Bottom Layer:
  rectangle net OUT2: 174.092,61.747 175.59,65.075
  rectangle net OUT2: 175.438,61.519 175.59,61.747
  rectangle net OUT2: 175.438,60.325 175.565,60.604
  rectangle net OUT2: 175.438,60.604 175.59,60.96
  rectangle net OUT2: 175.438,60.96 175.59,61.519
  rectangle net OUT2: 175.438,61.189 175.59,61.519
  rectangle net OUT2: 175.438,60.096 175.514,60.325
  rectangle net GND: 144.729,59.36 145.872,61.747
  rectangle net GND: 121.412,113.868 122.682,119.888
  rectangle net GND: 122.53,116.078 123.952,118.643
  rectangle net GND: 145.567,59.588 145.948,61.189

## Text inside footprints (layer, text, board x,y; h text height)
IC: Mechanical 13 "-" at 122.682,113.54 h1.27 r180; Mechanical 13 "I" at 125.226,113.543 h1.27 r180; Mechanical 13 "O" at 120.141,113.541 h1.27 r180